# Altium PCB 地面站侧板开孔尺寸图2.PcbDoc
Units mm, origin at the board's own origin, x right, y up, seen from the top; angles counter-clockwise.
Board outline 168.25 x 54.25 mm, 2 copper layers (Top Layer, Bottom Layer); 12 components, 0 nets, 28 pads, 0 vias.
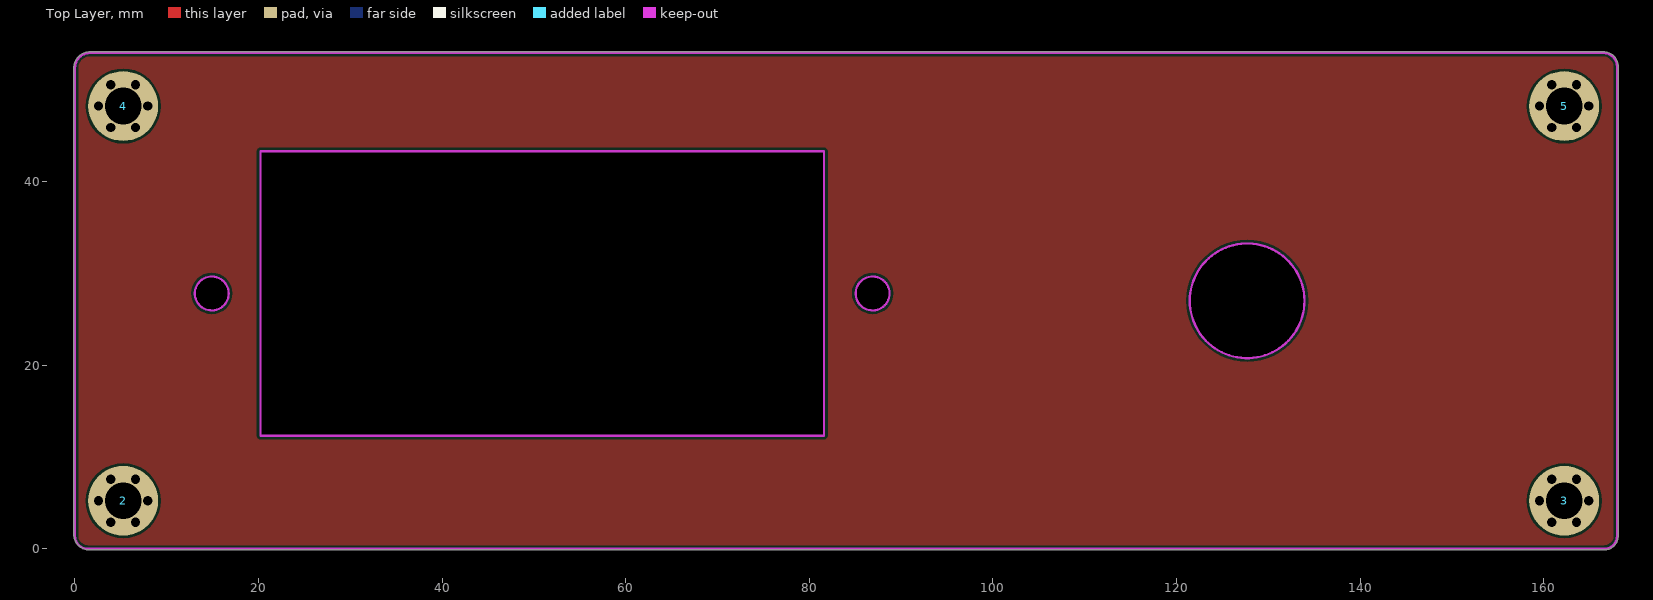
[diagram p0: Top Layer view]
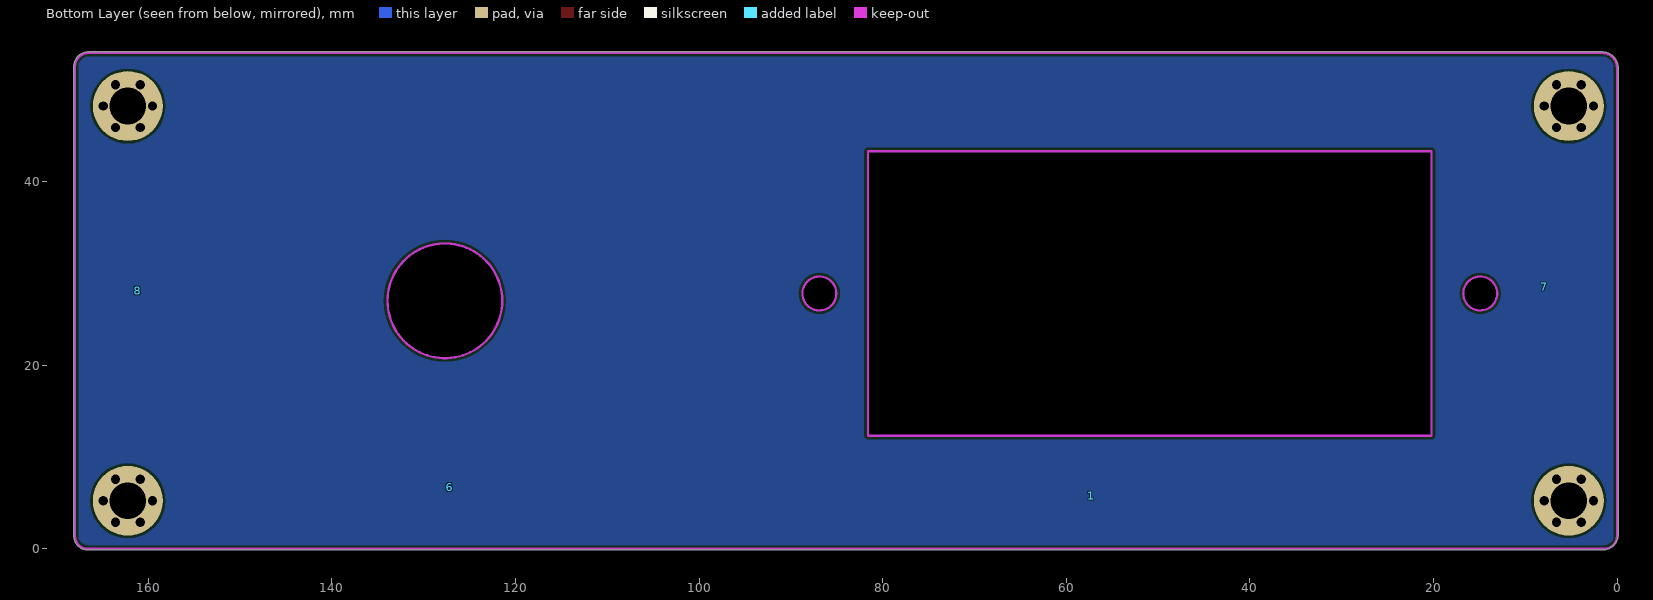
[diagram p1: Bottom Layer view, seen from below]

## Layer stack, top to bottom
Top Solder: solder mask 0.0102, Solder Resist, Dk 3.5
Top Layer: signal copper 0.0356
Dielectric 1: dielectric 0.32, FR-4, Dk 4.8
Bottom Layer: signal copper 0.0356
Bottom Solder: solder mask 0.0102, Solder Resist, Dk 3.5

## Board outline
1.536,-0.127 cw(c1.536,1.536) -0.127,1.536 cw(c0,1.536) -0.125,1.558 -0.125,52.35 cw(c0,52.372) -0.127,52.372 cw(c1.628,52.372) 1.628,54.127 cw(c1.628,54) 1.65,54.125 166.514,54.125 cw(c166.536,54) 166.536,54.127 cw(c166.536,52.536) 168.127,52.536 cw(c168,52.536) 168.125,52.514 168.125,1.394 cw(c168,1.372) 168.127,1.372 cw(c166.628,1.372) 166.628,-0.127 cw(c166.628,0) 166.606,-0.125 1.558,-0.125 cw(c1.536,0)
cut-out: 20.2,12.3 81.6,12.3 81.6,43.3 20.2,43.3
cut-out: 121.45,27 ccw(c127.7,27) 127.7,20.75 ccw(c127.7,27) 133.95,27 ccw(c127.7,27) 127.7,33.25 ccw(c127.7,27)
cut-out: 85.05,27.8 ccw(c86.9,27.8) 86.9,25.95 ccw(c86.9,27.8) 88.75,27.8 ccw(c86.9,27.8) 86.9,29.65 ccw(c86.9,27.8)
cut-out: 14.9,25.95 cw(c14.9,27.8) 13.05,27.8 cw(c14.9,27.8) 14.9,29.65 cw(c14.9,27.8) 16.75,27.8 cw(c14.9,27.8)

## Design rules (kind name [scope] priority, off if disabled: settings)
Clearance [All] p1: gap=0.254
PolygonConnect [All] p1: connectstyle=Relief reliefconductorwidth=0.254 reliefentries=4 polygonreliefangle="90 Angle" airgapwidth=0.254
RoutingVias [All] p1: holewidth=0.711 width=1.27 viastyle="Through Hole" minholewidth=0.711 minwidth=1.27 maxholewidth=0.711 maxwidth=1.27
SolderMaskExpansion [All] p1: expansion=0.102
Width [All] p1: maxlimit=0.254 minlimit=0.254 preferedwidth=0.254
30 further rules are at their usual default settings.

## Components (designator, comment, footprint, x,y, rotation, side; value= is the part's Value field where it differs from the comment)
1 "" LOGO_三脚插头 57.277,5.74 r90 bottom
2 "" "M4 定位孔" 5.5,5.5 r0 top
3 "" "M4 定位孔" 162.5,5.5 r0 top
4 "" "M4 定位孔" 5.5,48.5 r0 top
5 "" "M4 定位孔" 162.5,48.5 r0 top
6 "" LOGO_ROBOT 127.152,6.706 r180 bottom
7 "" LOGO_垃圾桶 7.925,28.524 r180 bottom
8 "" "SUB Master topoverlay" 161.188,28.092 r180 bottom
? "" "SUB Master topoverlay" 154.635,29.356 r0 top
? "" LOGO_ROBOT 127.254,6.666 r0 top
? "" LOGO_垃圾桶 6.858,28.473 r0 top
? "" LOGO_三脚插头 57.556,5.461 r0 top

## Footprints (in the part's own frame and the unit in brackets; to place one, negate y for a bottom-side part, rotate by r counter-clockwise, add the part's x,y. Pads: shape width x height; smd on the part's side, far side on the other; paste and mask are expansions set on the pad)
LOGO_ROBOT [mm]
LOGO_三脚插头 [mm]
LOGO_垃圾桶 [mm]
"M4 定位孔" [mil]
  round 40 hole 40: 1(-116,-11) 1(-63,-102.8) 1(-63,80.8) 1(43,-102.8) 1(43,80.8) 1(96,-11)
  round 300 hole 157.48: 1(-10,-11)
"SUB Master topoverlay" [mm]

## Nets (pads, with @x,y where several pads share a name; then routed paths per layer and width w, separated by ;. In a path a pad name is that pad's centre, name@x,y a point inside that pad or via, vN(x,y) a via of type N, cw(c..) or ccw(c..) an arc to the next point about the centre after c; other vN are vias at no path point)
pads on no net: 2.1 3.1 4.1 5.1

## Polygon pours and split planes (outlines as drawn)
no net on Top Layer "Top Layer-No Net" (solid, pour order 4): 0,52.372 cw(c1.628,52.372) 1.628,54 165.46,54 cw(c165.46,51.46) 168,51.46 168,1.372 cw(c166.628,1.372) 166.628,0 1.372,0 cw(c1.372,1.372) 0,1.372
no net on Bottom Layer "Top Layer-No Net" (solid, pour order 6): 0,52.372 cw(c1.628,52.372) 1.628,54 165.46,54 cw(c165.46,51.46) 168,51.46 168,1.372 cw(c166.628,1.372) 166.628,0 1.372,0 cw(c1.372,1.372) 0,1.372

## Keep-outs
Keep-Out Layer:
  circle w0.25: c86.9,27.8 r1.85
  circle w0.25: c14.9,27.8 r1.85
  circle w0.25: c127.7,27 r6.25
  lines w0.25: 0,1.372 0,27.8 ; 0,1.536 0,52.372 ; 1.372,0 14.9,0 ; 1.536,0 166.628,0 127.7,0 ; 1.628,54 166.536,54 ; 168,27 168,1.372 168,52.536 ; 20.2,12.3 81.6,12.3 81.6,43.3 20.2,43.3 20.2,12.3
  lines w0.254: 0,1.372 ccw(c1.372,1.372) 1.372,0 ; 0,52.372 cw(c1.628,52.372) 1.628,54 ; 166.536,54 cw(c166.536,52.536) 168,52.536 ; 166.628,0 ccw(c166.628,1.372) 168,1.372

## Silkscreen, mask and mechanical layers (free items; w line width, h text height)
Top Solder:
  text "AC220V" at 63.4,4.7 h5
Bottom Solder:
  text "AC220V" at 77.114,5.613 h5